# Altium PCB stm32f103_m95.PcbDoc (part 2 of 2)
Units mm, origin at the board's own origin, x right, y up, seen from the top; angles counter-clockwise.
Board outline 80 x 106 mm, 2 copper layers (Top Layer, Bottom Layer); 128 components, 90 nets, 432 pads, 87 vias.
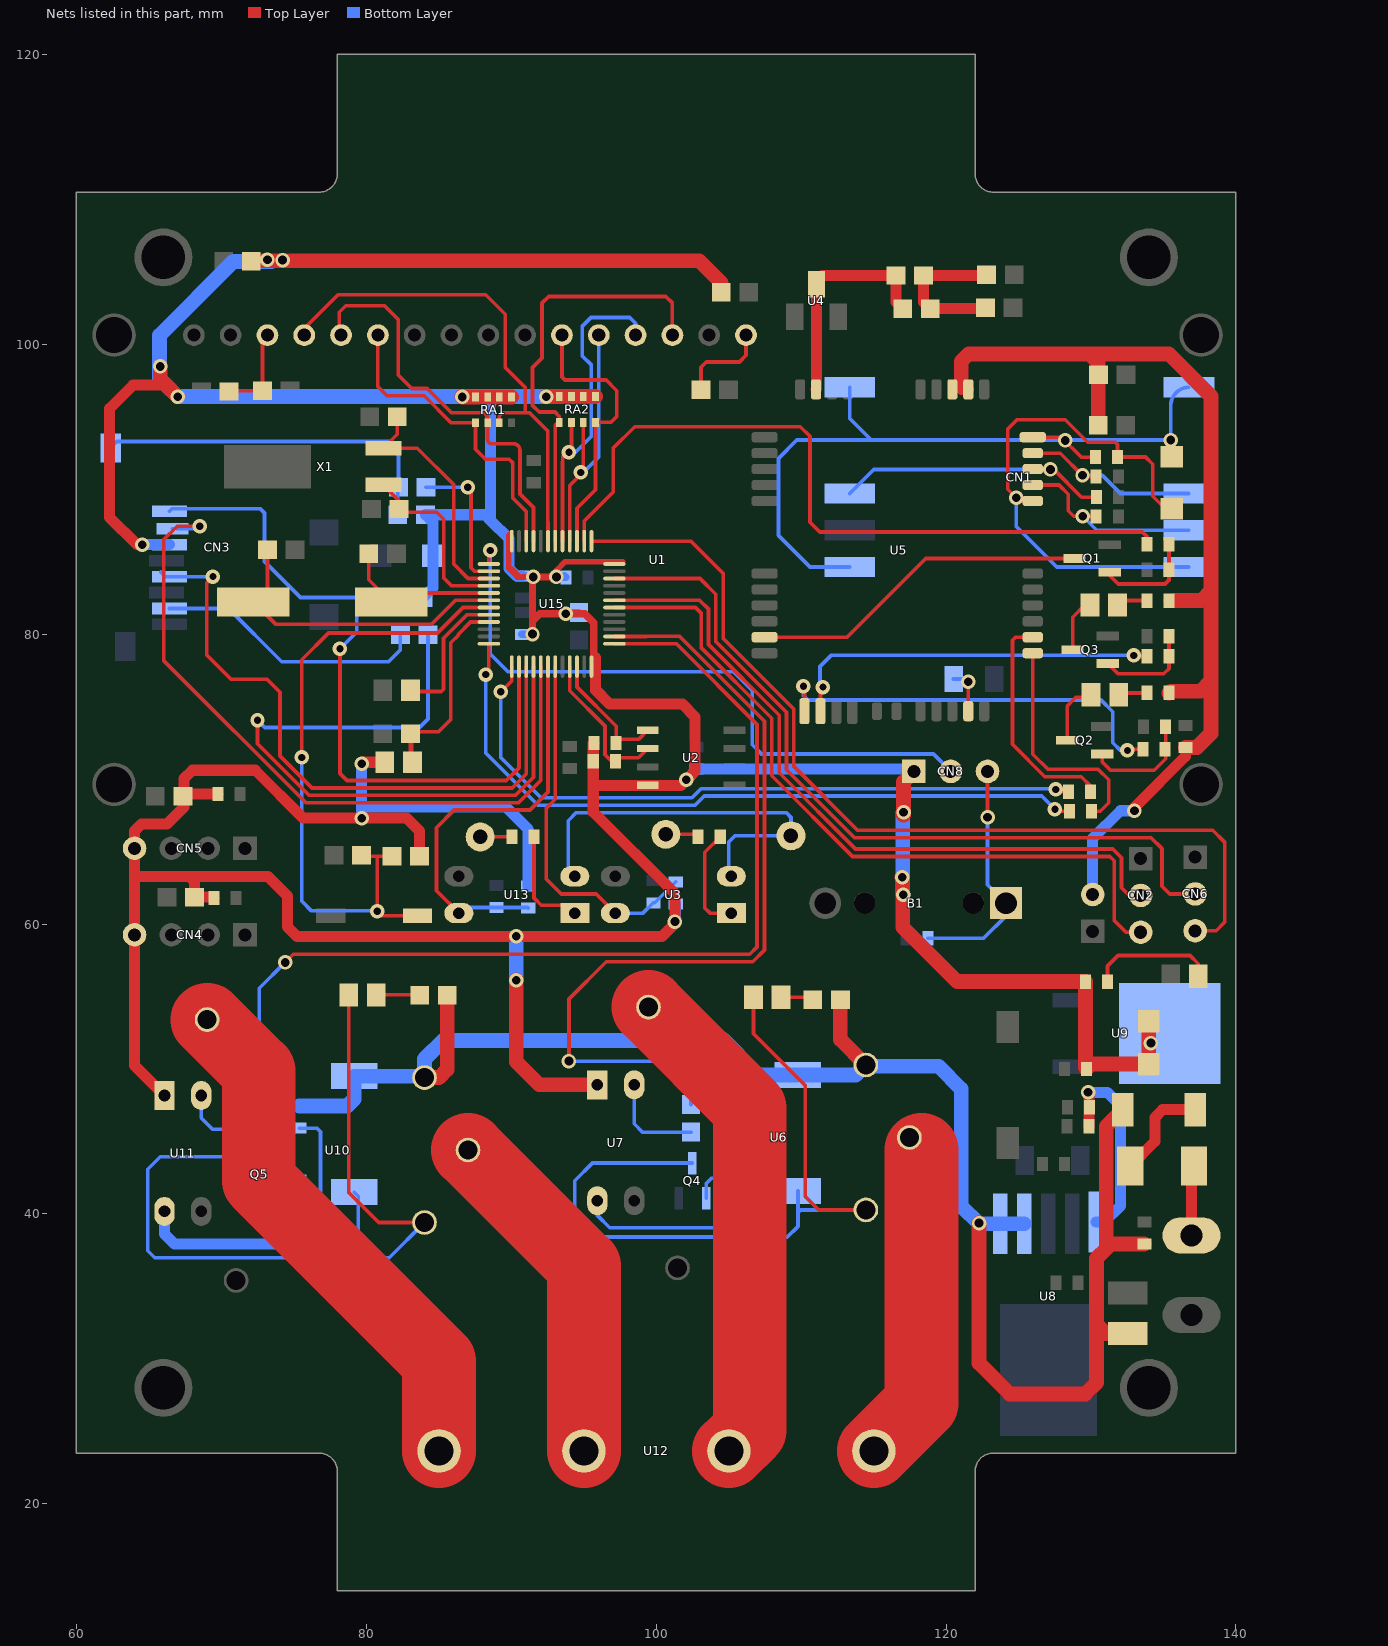
[diagram p2: the nets of this part, all layers, seen from the top]

## Via types
v1: diameter 1, hole 0.6, Top Layer to Bottom Layer, tented both sides, 63 vias
v2: diameter 1, hole 0.5, Top Layer to Bottom Layer, tented both sides, 24 vias

## Nets (pads, with @x,y where several pads share a name; then routed paths per layer and width w, separated by ;. In a path a pad name is that pad's centre, name@x,y a point inside that pad or via, vN(x,y) a via of type N, cw(c..) or ccw(c..) an arc to the next point about the centre after c; other vN are vias at no path point) (continued)
GND_SENSOR: CN12.1 U3.2 U13.2 | length 27.9
  Bottom Layer w0.254: U13.2@94.386,63.297 93.929,63.754 93.929,67.132 94.488,67.691 108.966,67.691 109.296,67.361 CN12.1@109.296,66.091 105.435,66.091 105.004,65.659 105.004,63.475 U3.2@105.181,63.297
GSM_PW: R5.1 U15.38 | length 51.8
  Top Layer w0.254: U15.38@95.036,86.423 95.036,87.351 ; 95.044,87.351 95.044,87.805 97.028,89.789 97.028,92.837 98.512,94.321 109.946,94.321 110.617,93.65 110.617,87.732 111.292,87.057 133.542,87.057 133.858,86.741 R5.1@133.858,86.209
IN0: C41.1 R4.1 U3.4 U15.19 | length 25.7
  Top Layer w0.254: U15.19@93.036,77.763 93.036,68.605 92.405,67.974 92.405,63.119 93.447,62.078 95.861,62.078 U3.4@97.181,60.757
  Bottom Layer w0.254: U3.4@97.181,60.757 99.087,60.757 C41.1@99.798,61.468 99.897,61.468 R4.1@101.345,62.916
IN1: C46.1 R29.1 U13.4 U15.18 | length 28.8
  Top Layer w0.254: U13.4@86.386,60.757 84.836,62.307 84.836,66.65 86.055,67.869 91.288,67.869 92.536,69.117 U15.18@92.536,77.763
  Bottom Layer w0.254: U13.4@86.386,60.757 86.767,61.138 C46.1@88.978,61.138 91.137,61.138 R29.1@91.162,61.112
INPUT0A: CN9.1 R21.1 | length 2.3
  Top Layer w0.254: CN9.1@100.66,66.192 102.719,66.192 R21.1@102.895,66.016
INPUT1A: CN11.1 R30.1 | length 2.2
  Top Layer w0.254: CN11.1@87.859,66.015 90.016,66.015 R30.1@90.043,66.041
"LCD DATA0": RA2.8 U1.11 U15.39 | length 19.2
  Top Layer w0.254: U1.11@93.497,100.635 93.497,97.739 93.701,97.536 96.545,97.536 97.282,96.799 97.282,95.021 96.876,94.615 RA2.8@95.809,94.615 95.809,92.743 95.809,89.961 94.544,88.697 ; U15.39@94.536,86.423 94.536,88.697
"LCD DATA1": RA2.7 U1.12 U15.40 | length 18.4
  Top Layer w0.254: U15.40@94.036,86.423 94.036,90.252 94.958,91.173 RA2.7@94.958,94.615
  Bottom Layer w0.254: v2@95.047,91.237 96.037,92.227 U1.12@96.037,100.635
  other v2: 94.793,91.161
"LCD DATA2": RA2.6 U1.13 U15.41 | length 24.4
  Top Layer w0.254: U15.41@93.536,86.423 93.536,91.907 93.544,91.915 ; 93.544,90.76 93.544,91.915 ; v2(93.98,92.558) ccw(c93.98,92.122) 93.544,92.122 93.544,91.915 ; v2@94.158,92.529 RA2.6@94.158,94.615
  Bottom Layer w0.254: v2(93.98,92.558) 94.437,92.558 95.529,93.65 95.529,98.577 94.906,99.2 94.906,101.27 94.92,101.27 95.504,101.854 98.171,101.854 98.577,101.448 U1.13@98.577,100.635
"LCD DATA3": RA2.5 U1.14 U15.42 | length 29.9
  Top Layer w0.254: U15.42@93.036,86.423 93.036,94.332 cw(c93.32,94.332) 93.099,94.509 93.214,94.509 RA2.5@93.32,94.615 93.32,95.021 93.015,95.326 91.923,95.326 91.465,95.783 91.465,98.4 92.126,99.06 92.126,102.845 92.583,103.302 100.66,103.302 101.117,102.845 U1.14@101.117,100.635
LCD_E: RA1.5 U1.6 U15.46 | length 21.9
  Top Layer w0.254: U1.6@80.797,100.635 80.797,97.079 81.432,96.444 83.991,96.444 85.845,94.59 RA1.5@87.528,94.59 87.528,92.761 88.214,92.075 89.865,92.075 90.094,91.846 90.094,89.408 91.036,88.466 U15.46@91.036,86.423
LCD_R/W: RA1.6 U1.5 U15.45 | length 28.4
  Top Layer w0.254: U1.5@78.257,100.635 78.13,100.762 78.13,102.21 78.588,102.667 81.255,102.667 82.206,101.715 82.206,97.88 83.134,96.952 84.201,96.952 85.878,95.275 88.113,95.275 88.367,95.021 RA1.6@88.367,94.59 88.367,93.447 ccw(c88.672,93.447) 88.672,93.142 90.145,93.142 cw(c90.145,92.685) 90.602,92.685 90.602,89.674 91.536,88.74 U15.45@91.536,86.423
LCD_RS: RA1.7 U1.4 U15.43 | length 35.8
  Top Layer w0.254: U1.4@75.717,100.635 75.717,101.092 78.054,103.429 88.24,103.429 89.586,102.083 89.586,98.4 90.957,97.028 90.957,95.275 ; RA1.7@89.167,94.437 RA1.7@89.167,94.59 89.167,95.034 89.408,95.275 90.957,95.275 ; 92.528,87.296 92.528,87.732 ; U15.43@92.536,86.423 92.536,87.724 92.528,87.732 ; 90.957,95.275 91.255,95.275 92.528,94.002 92.528,87.732
MCU_RX: R35.2 U15.13 | length 47.5
  Top Layer w0.254: v2(89.281,76.022) 90.036,76.777 U15.13@90.036,77.763 ; v2(127.559,69.291) 127.713,69.137 R35.2@128.448,69.137
  Bottom Layer w0.254: v2@89.269,76.276 89.269,71.487 92.05,68.707 102.464,68.707 103.099,69.342 127.508,69.342 v2(127.559,69.291)
MCU_TX: R34.2 U15.12 | length 50.1
  Top Layer w0.254: v2(88.24,77.216) 88.456,77.433 U15.12@88.456,79.343 ; v2(127.508,67.92) 127.636,67.791 R34.2@128.524,67.791
  Bottom Layer w0.254: v2(88.24,77.216) 88.24,71.799 91.839,68.199 102.674,68.199 103.309,68.834 126.594,68.834 v2(127.508,67.92)
NetB1_1: B1.1 C29.1 CN8.3 | length 16.6
  Top Layer w0.254: v1@122.809,67.31 v1(122.86,67.361) CN8.3@122.86,70.536
  Bottom Layer w0.254: C29.1@118.745,59.031 122.607,59.031 124.131,60.555 B1.1@124.131,61.443 122.86,62.714 v1(122.86,67.361)
NetC1_2: C1.2 C2.2 C4.1 C5.1 | length 10.7
  Top Layer w0.762: C2.2@122.724,102.513 122.673,102.462 C4.1@118.909,102.462 118.452,102.919 C5.1@118.452,104.748 122.749,104.748 C1.2@122.8,104.799
NetC4_2: C4.2 C5.2 U4.1 U5.39 | length 15.6
  Top Layer w0.762: U5.39@111.032,96.89 111.057,96.915 111.057,104.323 111.482,104.748 C5.2@116.552,104.748 116.552,102.919 C4.2@117.009,102.462
NetC14_1: C14.1 U5.19 | length 3.2
  Top Layer w0.254: U5.19@121.532,74.69 v1(121.532,76.726) v1@121.564,76.759
  Bottom Layer w0.254: C14.1@120.517,76.911 121.346,76.911 v1(121.532,76.726)
NetC25_1: C25.1 L3.2 U15.9 | length 15.1
  Top Layer w0.254: C25.1@83.037,73.134 83.037,71.302 L3.2@83.139,71.2 ; C25.1@83.139,73.134 L3.2@83.139,71.2 ; L3.2@83.175,71.164 L3.2@83.139,71.2 ; C25.1@83.672,73.232 83.632,73.272 84.981,73.272 85.827,74.117 85.827,79.408 86.335,79.916 86.335,79.985 87.193,80.843 U15.9@88.456,80.843
NetD1_1: D1.1 LED4.2 Q4.3 U6.3 | length 55.1
  Top Layer w0.254: LED4.2@106.718,54.946 106.718,52.438 110.287,48.87 110.287,41.199 111.211,40.275 U6.3@114.47,40.275 U6.3@114.327,40.132
  Bottom Layer w0.254: Q4.3@102.496,43.512 95.608,43.512 94.386,42.291 94.386,38.913 94.894,38.405 109.042,38.405 109.779,39.141 109.779,40.081 ; D1.1@109.779,41.58 109.779,40.081 ; U6.3@114.47,40.275 109.972,40.275 109.779,40.081
NetD2_1: D2.1 F1.2 | length 7
  Top Layer w0.762: F1.2@132.709,43.307 134.417,45.015 134.417,46.66 134.95,47.193 D2.1@137.185,47.193
NetD4_1: D4.1 LED6.2 Q5.3 U10.3 | length 58.3
  Top Layer w0.254: LED6.2@78.785,55.115 78.785,41.484 80.858,39.411 U10.3@84.015,39.411
  Bottom Layer w0.254: Q5.3@72.6,43.944 65.788,43.944 64.922,43.078 64.922,37.465 65.405,36.982 79.451,36.982 ; D4.1@79.172,41.504 79.451,41.224 79.451,36.982 ; U10.3@84.015,39.411 81.586,36.982 79.451,36.982
NetF1_1: F1.1 J1.1 | length 4.9
  Top Layer w0.762: J1.1@136.931,38.52 136.931,43.129 F1.1@137.109,43.307
NetL4_1: L4.1 U15.8 | length 10.1
  Top Layer w0.254: L4.1@83.037,76.131 83.121,76.048 85.166,76.048 85.319,76.2 85.319,79.723 86.938,81.343 87.224,81.343 ; 87.591,81.343 87.224,81.343 ; U15.8@88.456,81.343 87.224,81.343
NetLED2_1: LED2.1 R10.2 | length 2
  Top Layer w0.254: LED2.1@131.91,75.825 132.03,75.945 R10.2@133.858,75.945
NetLED2_2: LED2.2 Q2.3 | length 4.4
  Top Layer w0.254: Q2.3@128.354,72.678 128.354,75.04 128.956,75.641 LED2.2@130.099,75.641
NetLED3_1: LED3.1 R13.2 | length 2.1
  Top Layer w0.254: LED3.1@131.834,82.022 132.132,82.32 R13.2@133.858,82.32
NetLED3_2: LED3.2 Q3.3 | length 3.8
  Top Layer w0.254: Q3.3@128.735,78.926 128.735,81.167 129.591,82.022 LED3.2@129.934,82.022
NetLED4_1: LED4.1 R19.2 | length 2.3
  Top Layer w0.254: LED4.1@108.618,54.946 110.628,54.946 R19.2@110.805,54.769
NetLED5_1: LED5.1 R26.2 | length 8.7
  Top Layer w0.254: R26.2@131.14,56.034 131.14,57.099 131.87,57.829 136.837,57.829 137.396,57.269 LED5.1@137.396,56.394
NetLED6_1: LED6.1 R28.2 | length 3
  Top Layer w0.254: LED6.1@80.685,55.115 83.66,55.115 R28.2@83.684,55.091
NetQ1_1: Q1.1 R5.2 R6.2 | length 7.1
  Top Layer w0.254: Q1.1@131.287,84.276 131.287,84.054 131.877,83.464 135.103,83.464 135.382,83.744 R6.2@135.382,84.431 R5.2@135.382,86.209
NetQ2_1: Q2.1 R14.1 R16.2 | length 7.8
  Top Layer w0.254: Q2.1@130.779,71.728 130.779,71.176 131.343,70.612 133.045,70.612 134.366,70.612 135.153,71.399 R14.1@135.153,72.109 ; R14.1@135.103,72.058 R14.1@135.153,72.109 ; R16.2@135.153,73.611 R14.1@135.153,72.109
NetQ3_1: Q3.1 R15.2 R17.1 | length 6.9
  Top Layer w0.254: Q3.1@131.16,77.976 131.87,77.267 135.026,77.267 135.382,77.622 R15.2@135.382,78.462 R17.1@135.382,79.856
NetQ4_1: Q4.1 R38.1 | length 3.4
  Bottom Layer w0.254: Q4.1@103.446,41.087 103.446,42.105 103.81,42.469 R38.1@105.713,42.469
NetQ5_1: Q5.1 R41.1 | length 1.7
  Bottom Layer w0.254: Q5.1@73.55,41.461 Q5.1@73.55,41.519 74.563,41.519 R41.1@75.028,41.984
NetR1_2: R1.2 R3.1 U1.3 | length 6.5
  Top Layer w0.254: R3.1@70.522,96.747 70.522,96.798 R1.2@72.838,96.798 72.838,100.635 U1.3@73.177,100.635
NetR2_1: R2.1 U1.16 | length 6.4
  Top Layer w0.254: R2.1@103.094,96.869 103.094,98.42 103.454,98.781 105.74,98.781 106.197,99.238 U1.16@106.197,100.635
NetR14_2: R14.2 U5.12 | length 28.6
  Top Layer w0.254: v2(110.16,76.403) 110.232,76.331 U5.12@110.232,74.69 ; v2(132.512,71.984) 132.587,72.058 R14.2@133.579,72.058
  Bottom Layer w0.254: v2(110.16,76.403) 110.16,75.768 110.465,75.463 130.683,75.463 131.496,74.651 131.496,72.517 132.029,71.984 v2(132.512,71.984)
NetR15_1: R15.1 U5.13 | length 26.3
  Top Layer w0.254: U5.13@111.332,74.69 111.332,76.178 v2(111.506,76.352) ; v2(132.944,78.537) 133.018,78.462 R15.1@133.858,78.462 R15.1@133.663,78.657
  Bottom Layer w0.254: v2@111.303,76.429 111.303,77.775 112.065,78.537 v2(132.944,78.537)
NetR20_1: R20.1 R38.2 U7.4 | length 19.9
  Bottom Layer w0.254: U7.4@95.943,40.912 95.943,39.897 96.799,39.04 104.851,39.04 105.713,39.902 R38.2@105.713,40.945 106.985,40.945 107.417,41.377 107.417,44.704 106.578,45.542 R20.1@105.615,45.542
NetR21_2: R21.2 U3.1 | length 7.3
  Top Layer w0.254: R21.2@104.419,66.016 103.353,64.949 103.353,61.112 103.708,60.757 U3.1@105.181,60.757
NetR22_2: R22.2 U7.2 | length 6.8
  Bottom Layer w0.254: U7.2@98.483,48.912 98.483,46.221 99.059,45.645 R22.2@102.401,45.645
NetR24_2: R24.2 R27.1 U8.5 | length 14.1
  Top Layer w0.762: v1(129.794,48.387) 129.87,48.311 R27.1@129.87,46.049
  Bottom Layer w0.762: v1(129.794,48.387) 131.14,48.387 132.029,47.498 132.029,40.564 130.912,39.447 U8.5@130.342,39.447
NetR30_2: R30.2 U13.1 | length 7.5
  Top Layer w0.254: R30.2@91.567,66.041 91.567,61.798 92.075,61.29 93.853,61.29 U13.1@94.386,60.757
NetR31_2: R31.2 U11.2 | length 5.9
  Bottom Layer w0.254: U11.2@68.612,48.175 68.612,46.628 69.392,45.848 R31.2@72.607,45.848
NetR39_1: R39.1 R41.2 U11.4 | length 21.1
  Bottom Layer w0.254: R39.1@75.363,45.923 76.581,45.923 76.835,45.669 76.835,41.529 76.124,40.818 R41.2@75.386,40.818
  Bottom Layer w0.762: U11.4@66.072,40.175 66.072,38.601 66.751,37.922 74.651,37.922 75.386,38.657 R41.2@75.386,40.818
OUT1: R22.1 U15.26 | length 59.5
  Top Layer w0.254: v1(93.98,50.546) 93.98,54.839 96.545,57.404 106.662,57.404 107.467,58.21 107.467,73.987 101.603,79.851 98.425,79.851 ; U15.26@97.116,79.843 99.303,79.843
  Bottom Layer w0.254: v1(93.98,50.546) 101.473,50.546 102.401,49.618 R22.1@102.401,47.545
OUT2: R31.1 U15.25 | length 71.1
  Top Layer w0.254: v1(74.397,57.353) 74.955,57.912 106.451,57.912 106.959,58.42 106.959,73.776 101.401,79.335 98.611,79.335 ; U15.25@97.116,79.343 98.603,79.343 98.611,79.335 ; 98.374,79.335 98.611,79.335
  Bottom Layer w0.254: R31.1@72.607,47.748 72.607,55.564 v1(74.397,57.353)
PWRKEY: Q1.3 U5.10 | length 23.6
  Top Layer w0.254: U5.10@107.482,79.79 113.166,79.79 118.601,85.226 Q1.3@128.862,85.226
RL_CM0: U6.5 U12.1 | length 23.3
  Top Layer w2.286: U6.5@117.47,45.275 118.304,44.441
  Top Layer w5.08: U12.1@115.015,23.646 118.304,26.935 118.304,44.441
RL_CM1: U10.4 U12.4 | length 36.4
  Top Layer w5.08: U10.4@69.015,53.411 72.566,49.86 72.566,42.293 85.015,29.844 U12.4@85.015,23.646
RL_NO0: U6.4 U12.2 | length 34.1
  Top Layer w5.08: U6.4@99.47,54.275 106.451,47.293 106.451,25.083 U12.2@105.015,23.646
RL_NO1: U10.5 U12.3 | length 24.1
  Top Layer w5.08: U10.5@87.015,44.411 95.015,36.411 U12.3@95.015,23.646
RST: C24.1 R25.2 SW2.1 U15.7 | length 45.4
  Top Layer w0.254: v2(75.54,71.501) 75.54,78.232 77.394,80.086 84.912,80.086 86.669,81.843 U15.7@88.456,81.843 ; C24.1@79.659,64.752 79.735,64.675 80.645,64.675 ; R25.2@81.772,64.675 80.645,64.675 ; SW2.1@83.541,60.579 81.051,60.579 v2(80.747,60.884) 80.747,64.574 80.645,64.675
  Bottom Layer w0.254: v2(75.54,71.501) 75.54,61.595 76.225,60.909 80.721,60.909 v2(80.747,60.884)
RTXC1: C21.2 U15.4 X1.2 | length 12.9
  Top Layer w0.254: X1.2@81.178,90.297 82.261,89.215 C21.2@82.261,88.639 82.482,88.417 84.861,88.417 85.344,87.935 85.344,83.871 85.872,83.343 U15.4@88.456,83.343
RTXC2: C19.2 U15.3 X1.1 | length 16.8
  Top Layer w0.254: C19.2@82.134,94.989 82.134,93.792 X1.1@81.178,92.837 83.515,92.837 86.03,90.322 86.03,84.836 87.023,83.843 U15.3@88.456,83.843
RX: CN2.2 U15.31 | length 50.9
  Top Layer w0.254: U15.31@97.116,82.343 101.357,82.343 101.349,82.351 ; 100.228,82.351 101.349,82.351 ; CN2.2@133.426,61.976 132.639,61.976 132.105,62.509 132.105,64.574 131.503,65.176 113.752,65.176 108.483,70.445 108.483,74.408 103.607,79.284 103.607,81.737 102.993,82.351 101.349,82.351
RX_GSM: R34.1 U5.21 | length 15.9
  Top Layer w0.254: U5.21@125.982,78.69 125.982,71.724 127.025,70.68 130.488,70.68 131.216,69.952 131.216,68.377 130.631,67.791 R34.1@130.048,67.791
SCL: R33.1 U2.6 U15.21 | length 10.6
  Top Layer w0.254: U15.21@94.036,77.763 94.036,76.093 96.469,73.66 96.469,71.683 96.932,71.22 R33.1@97.18,71.22 97.432,71.472 98.771,71.472 U2.6@99.41,72.111
SD_CK: CN3.5 U15.15 | length 45.6
  Top Layer w0.254: v2(69.418,83.972) 68.986,83.541 68.986,78.562 70.663,76.886 73.152,76.886 74.041,75.997 74.041,71.603 76.251,69.393 90.068,69.393 91.036,70.361 U15.15@91.036,77.763
  Bottom Layer w0.254: CN3.5@65.811,84.293 66.13,83.974 CN3.5@66.421,83.974 69.416,83.974 v2(69.418,83.972)
SD_DT: R11.1 U15.2 | length 10
  Top Layer w0.254: v2@87.3,89.992 87.224,89.916 87.224,84.582 87.463,84.343 U15.2@88.456,84.343
  Bottom Layer w0.254: R11.1@84.123,90.146 86.993,90.146 v2@87.224,89.916
  other v2: 86.995,90.145
SD_MISO: CN3.7 R8.2 | length 18.8
  Bottom Layer w0.254: CN3.7@66.421,81.774 70.499,81.774 74.168,78.105 81.534,78.105 82.35,78.921 R8.2@82.35,79.961
SD_MOSI: CN3.2 U15.17 | length 51.7
  Top Layer w0.254: v2(68.504,87.452) 66.954,87.452 66.015,86.512 66.015,78.192 75.83,68.377 90.5,68.377 92.036,69.913 U15.17@92.036,77.763
  Bottom Layer w0.254: CN3.2@66.621,87.274 68.326,87.274 v2(68.504,87.452)
SD_WP: CN3.10 R9.2 R11.2 | length 24.8
  Bottom Layer w0.254: CN3.10@62.357,92.862 62.789,93.294 81.737,93.294 82.223,92.809 R11.2@82.223,90.146 82.172,90.095 R9.2@82.172,88.241
SDA: R32.2 U2.5 U15.22 | length 8.9
  Top Layer w0.254: U15.22@94.536,77.763 94.536,76.355 97.238,73.653 R32.2@97.238,72.5 ; R32.2@97.231,72.493 R32.2@97.238,72.5 ; U2.5@99.41,73.381 98.771,72.742 97.48,72.742 R32.2@97.238,72.5
SIM_CLK: C8.1 CN1.3 U5.30 | length 15.2
  Top Layer w0.254: U5.30@125.982,92.49 127.88,92.49 v1(129.413,90.957) 129.496,90.874 C8.1@130.36,90.874 ; 127.88,92.489 v1@129.496,90.874
  Bottom Layer w0.254: v1(129.413,90.957) 130.785,90.957 132.029,89.713 CN1.3@136.754,89.713
SIM_DATA: C7.1 CN1.7 U5.29 | length 20
  Top Layer w0.254: U5.29@125.982,91.39 127.406,91.39 v1@127.433,91.364 ; v1(127.203,91.364) v1@127.433,91.364 ; C7.1@130.385,89.452 129.351,89.452 127.439,91.364 v1@127.433,91.364
  Bottom Layer w0.254: CN1.7@113.354,89.713 115.005,91.364 v1(127.203,91.364)
SIM_GND: C3.2 C6.1 CN1.4 CN1.5 CN1.8 U5.31 | length 53.4
  Top Layer w0.254: U5.31@125.982,93.59 127.949,93.59 129.337,92.202 130.291,92.202 C6.1@130.309,92.22 ; v1(135.509,93.396) cw(c135.509,93.345) 135.56,93.345 C3.2@135.56,92.249
  Bottom Layer w0.254: CN1.5@113.354,84.633 110.617,84.633 108.433,86.817 108.433,92.126 109.703,93.396 114.833,93.396 ; CN1.8@113.354,97.033 113.354,94.876 114.833,93.396 ; CN1.4@136.754,97.033 ccw(c136.754,95.788) 135.509,95.788 v1(135.509,93.396) 114.833,93.396
  other v1: 128.219,93.37
SIM_RST: C9.1 CN1.2 U5.28 | length 14.6
  Top Layer w0.254: U5.28@125.982,90.29 127.794,90.29 128.422,89.662 128.422,88.519 128.811,88.131 C9.1@130.36,88.131 130.352,88.138 v1(129.438,88.138)
  Bottom Layer w0.254: v1(129.438,88.138) 130.404,87.173 CN1.2@136.754,87.173
SIM_VCC: C3.1 C6.2 CN1.1 U5.27 | length 37.2
  Top Layer w0.254: U5.27@125.982,89.19 125.059,89.19 v1(124.841,89.408) 124.257,89.992 124.257,94.158 124.892,94.793 128.219,94.793 129.769,93.243 131.674,93.243 131.833,93.084 C6.2@131.833,92.22 133.764,92.22 134.264,91.719 134.264,89.51 135.125,88.649 C3.1@135.56,88.649
  Bottom Layer w0.254: v1(124.841,89.408) 124.841,87.427 127.635,84.633 CN1.1@136.754,84.633
SPI1_MISO: R8.1 U15.16 | length 48.3
  Top Layer w0.254: v2(72.492,74.066) 72.492,72.434 76.04,68.885 90.29,68.885 91.528,70.123 91.528,71.081 91.536,71.089 U15.16@91.536,77.763
  Bottom Layer w0.254: v2(72.492,74.066) 73,73.558 83.668,73.558 84.25,74.141 R8.1@84.25,79.961
SPI1_NSS: CN3.1 R12.2 U15.14 | length 52.9
  Top Layer w0.254: v2(78.181,78.994) 78.181,70.383 78.664,69.901 89.662,69.901 90.536,70.775 U15.14@90.536,77.763
  Bottom Layer w0.254: CN3.1@66.421,88.484 66.583,88.646 72.695,88.646 72.974,88.367 72.974,85.014 75.462,82.526 79.35,82.526 ; v2(78.181,78.994) 79.35,80.162 79.35,82.526 ; 79.502,82.374 79.35,82.526 ; R12.2@82.02,82.526 79.35,82.526
SWCLK: CN6.3 U15.37 | length 65
  Top Layer w0.254: U15.37@95.536,86.423 102.387,86.423 104.623,84.187 104.623,79.705 109.499,74.828 109.499,70.866 113.894,66.472 138.405,66.472 139.217,65.659 139.217,60.122 138.633,59.538 CN6.3@137.185,59.538
SWDIO: CN6.2 U15.34 | length 54.8
  Top Layer w0.254: U15.34@97.116,83.843 103.025,83.843 104.115,82.753 104.115,79.495 108.991,74.618 108.991,70.656 113.683,65.964 134.143,65.964 134.899,65.207 134.899,62.611 135.433,62.078 CN6.2@137.185,62.078
TX: CN2.3 U15.30 | length 51.7
  Top Layer w0.254: U15.30@97.116,81.843 102.714,81.843 103.099,81.458 103.099,79.074 107.975,74.197 107.975,70.235 113.542,64.668 131.293,64.668 131.597,64.364 131.597,60.249 132.41,59.436 CN2.3@133.426,59.436
TX_GSM: R35.1 U5.22 | length 15.6
  Top Layer w0.254: U5.22@125.982,79.79 124.79,79.79 124.587,79.587 124.587,72.4 126.815,70.172 129.319,70.172 129.972,69.52 R35.1@129.972,69.137
V_BAT: CN8.2 U15.1 | length 45.4
  Top Layer w0.254: U15.1@88.456,84.843 88.456,85.688 v2(88.544,85.776)
  Bottom Layer w0.254: v2(88.544,85.776) 88.544,78.638 89.764,77.419 105.308,77.419 106.629,76.098 106.629,72.365 107.264,71.73 119.126,71.73 CN8.2@120.32,70.536
VCC: C15.1 C20.1 C22.1 C23.1 C26.1 C27.1 C30.1 C31.1 C35.1 C36.1 C37.1 C43.1 C44.1 CN3.3 CN4.4 CN5.4 CN8.1 L3.1 R4.2 R9.1 R12.1 R18.1 R23.1 R25.1 R26.1 R29.2 R32.1 R33.2 RA1.1 RA1.2 RA1.3 RA1.4 RA2.1 RA2.2 RA2.3 RA2.4 U2.8 U7.1 U9.2 U11.1 U15.24 U15.36 U15.48 | length 375.1
  Top Layer w0.381: 89.865,86.868 89.814,86.817 89.814,84.557 90.424,83.947 90.576,83.947 ; 90.036,84.487 90.576,83.947 ; v1(91.516,83.947) 90.576,83.947 ; v1(93.116,83.947) 93.116,84.404 93.726,85.014 97.688,85.014
  Top Layer w0.508: v1(91.465,80.01) 91.465,80.899 ; v1(93.116,83.947) v1(91.516,83.947) 91.465,83.896 91.465,80.899 ; 96.793,75.176 96.613,75.176 95.682,76.107 95.682,80.797 95.072,81.407 v1(93.751,81.407) 91.973,81.407 91.465,80.899
  Top Layer w0.762: v1(64.549,86.174) 64.168,86.174 62.281,88.062 62.281,95.555 63.919,97.193 66.18,97.193 ; U11.1@66.072,48.175 64.008,50.239 CN4.4@64.008,59.258 64.008,63.144 ; R23.1@67.34,68.816 R23.1@67.416,68.892 ; R23.1@67.416,68.816 67.416,68.077 66.243,66.904 64.491,66.904 64.008,66.421 CN5.4@64.008,65.227 64.008,63.144 ; 67.97,63.119 68.153,62.936 R18.1@68.153,61.856 69.438,61.856 C23.1@69.494,61.8 ; C31.1@69.774,68.988 67.512,68.988 R23.1@67.416,68.892 ; v1(79.68,71.069) 79.774,71.164 L3.1@81.275,71.164 ; R25.1@83.672,64.675 83.672,66.416 82.779,67.31 v1(79.68,67.31) 75.64,67.31 72.338,70.612 67.996,70.612 67.416,70.033 R23.1@67.416,68.892 ; R32.1@95.707,72.493 95.656,72.442 R33.2@95.656,71.22 95.656,69.571 ; 95.783,69.698 95.656,69.571 ; 95.798,78.384 95.798,76.171 96.793,75.176 101.811,75.176 102.692,74.295 102.692,70.561 v1(102.083,69.952) 101.702,69.571 U2.8@99.41,69.571 95.656,69.571 ; 64.008,63.144 64.135,63.271 73.228,63.271 74.555,61.944 74.555,59.811 75.222,59.144 100.406,59.144 101.295,60.033 v1(101.295,60.173) 101.295,62.103 95.656,67.742 95.656,69.571
  Top Layer w1.016: v1(65.786,98.476) 65.786,97.587 66.18,97.193 v1(66.98,96.393) ; C35.1@72.065,105.722 72.108,105.766 102.972,105.766 104.491,104.246 C37.1@104.491,103.6 ; v1@86.589,96.393 v1(86.614,96.368) RA1.4@87.528,96.368 RA1.3@88.367,96.368 RA1.2@89.167,96.368 RA1.1@90.018,96.368 ; v1(90.348,56.134) 90.348,50.495 91.931,48.912 U7.1@95.943,48.912 ; v1(92.405,96.393) RA2.4@93.32,96.393 RA2.3@94.158,96.393 RA2.2@94.958,96.393 RA2.1@95.809,96.393 ; v1(116.967,63.221) 117.018,63.17 117.018,59.792 120.776,56.034 R26.1@129.616,56.034 129.616,50.087 C30.1@129.692,50.011 130.024,50.343 C44.1@133.988,50.343 C43.1@133.988,53.289 ; v1@117.069,67.513 v1(117.069,67.716) 117.069,69.825 CN8.1@117.78,70.536
  Bottom Layer w0.508: C36.1@90.73,79.985 91.44,79.985 v1(91.465,80.01) ; C15.1@90.753,84.023 91.44,84.023 v1(91.516,83.947) ; v1(93.116,83.947) 93.143,83.92 C27.1@93.777,83.92 C27.1@93.674,84.023 ; v1(93.751,81.407) 93.832,81.488 C22.1@94.673,81.488
  Bottom Layer w0.762: v1(64.549,86.174) CN3.3@66.421,86.174 ; v1(79.68,67.31) 79.68,68.072 ; v1(79.68,71.069) 79.68,68.072 ; R12.1@83.92,82.526 84.597,83.204 C20.1@84.597,85.403 84.597,87.716 R9.1@84.072,88.241 88.187,88.241 88.582,87.846 ; 88.57,96.393 88.582,96.38 88.582,87.846 ; C15.1@90.753,84.023 90.348,84.023 89.84,84.531 89.84,86.589 88.582,87.846 ; R29.2@91.162,62.636 91.162,66.547 89.637,68.072 79.68,68.072 ; v1(101.295,60.173) 101.345,60.222 R4.2@101.345,61.392 ; v1(102.083,69.952) C26.1@102.819,70.688 ; C26.1@102.795,70.688 C26.1@102.819,70.688 ; CN8.1@117.78,70.536 117.627,70.688 C26.1@102.819,70.688
  Bottom Layer w1.016: v1@73.457,105.715 70.815,105.715 65.735,100.635 65.735,97.638 v1(66.98,96.393) 88.57,96.393 v1(92.405,96.393) ; v1(90.348,56.134) v1@90.348,58.953 ; v1(117.043,62.027) 117.018,62.052 117.018,67.666 v1(117.069,67.716)
  other v1: 134.137,51.791 90.348,59.157 74.219,105.816 73.177,105.842
VGSM: C10.1 C11.1 C12.1 CN7.2 R10.1 R13.1 U5.33 U5.34 | length 71.5
  Top Layer w0.762: 121.056,97.46 121.056,96.89 U5.33@121.532,96.89 ; C11.1@130.5,94.405 C11.1@130.5,94.92 ; C10.1@130.5,97.91 C10.1@130.526,97.91 ; v1(132.994,67.818) 132.994,68.051 136.524,71.58 C12.1@136.524,72.187 ; R13.1@135.382,82.32 135.839,82.32
  Top Layer w1.016: 121.056,97.46 121.056,98.831 121.564,99.339 129.896,99.339 ; C11.1@130.5,94.92 130.5,97.91 130.5,98.735 129.896,99.339 ; R10.1@135.382,75.945 135.51,76.073 137.566,76.073 138.278,76.784 ; 135.839,82.32 137.592,82.32 138.278,83.006 ; C12.1@136.524,72.187 137.312,72.187 138.278,73.152 138.278,76.784 ; 129.896,99.339 135.357,99.339 138.278,96.418 138.278,83.006 ; 138.278,76.784 138.278,83.006
  Bottom Layer w0.762: CN7.2@130.117,62.041 130.117,65.906 132.029,67.818 v1(132.994,67.818)
VPP: C28.1 C45.1 D1.2 D2.2 D4.2 R19.1 R20.2 R28.1 R39.2 U6.2 U8.1 U8.2 U10.2 | length 123.7
  Top Layer w1.016: U10.2@84.015,49.411 85.022,49.411 85.584,49.973 R28.1@85.584,55.091 ; R19.1@112.705,54.769 112.705,52.04 U6.2@114.47,50.275 ; v1(122.276,39.37) 122.276,29.693 124.384,27.584 129.616,27.584 130.378,28.346 130.378,32.385 ; D2.2@132.185,47.193 131.047,46.055 131.047,37.601 ; C45.1@132.537,31.75 131.013,31.75 130.378,32.385 ; C28.1@133.679,37.922 131.369,37.922 131.047,37.601 ; 130.378,32.385 130.378,36.932 131.047,37.601
  Bottom Layer w1.016: R39.2@75.363,47.447 78.689,47.447 79.172,47.93 D4.2@79.172,49.504 83.923,49.504 U10.2@84.015,49.411 84.015,50.69 85.293,51.968 104.699,51.968 105.615,51.053 105.615,49.125 ; R20.2@105.615,47.066 105.615,49.125 ; U6.2@114.47,50.275 U6.2@114.385,50.19 ; U8.2@125.392,39.32 U8.1@123.742,39.32 122.275,39.32 121.056,40.538 121.056,48.616 119.482,50.19 U6.2@114.385,50.19 ; 105.615,49.125 106.069,49.58 D1.2@109.779,49.58 113.775,49.58 U6.2@114.385,50.19
XTAL1: C13.2 U15.5 XT2.2 | length 10.2
  Top Layer w0.254: C13.2@80.172,85.554 80.172,84.699 80.172,83.76 XT2.2@81.712,82.22 ; XT2.2@82.55,82.321 82.55,82.22 83.173,82.843 U15.5@88.456,82.843
XTAL2: C38.2 U15.6 XT2.1 | length 21.2
  Top Layer w0.254: XT2.1@72.212,82.22 73.736,80.696 84.506,80.696 86.145,82.335 88.448,82.335 U15.6@88.456,82.343 ; XT2.1@73.05,82.22 73.187,82.357 C38.2@73.187,85.834
pads on no net: B1.0 CN1.6 CN3.4 CN3.8 CN3.9 CN3.12 CN4.2 CN5.2 RA1.8 U1.M1 U1.M2 U1.M3 U1.M4 U5.1 U5.2 U5.3 U5.4 U5.5 U5.6 U5.7 U5.8 U5.9 U5.11 U5.14 U5.15 U5.16 U5.17 U5.18 U5.20 U5.24 U5.25 U5.26 U5.32 U5.41 U5.42 U5.223 U6.1 U10.1 U15.27 U15.28 U15.29 U15.32 U15.33

## Polygon pours and split planes (outlines as drawn)
GND on Top Layer "Bottom Layer-No Net" (solid, remove dead copper, pour order 2): 59.995,105.842 139.903,105.842 140.056,105.842 140.056,59.08 140.056,23.5 140,23.5 121.539,23.5 121.539,23.597 121.539,58.115 120.726,58.115 59.919,58.115 59.919,66.116 59.919,105.766 59.995,105.766
GND on Bottom Layer "Bottom Layer-No Net" (solid, remove dead copper, pour order 4): 59.944,105.816 140.056,105.816 140.056,104.546 140.056,23.52 138.633,23.52 121.336,23.52 121.336,23.673 121.336,58.014 118.008,58.014 60.046,58.014 60.046,60.706 60.046,105.816 59.944,105.816

## Keep-outs
Keep-Out Layer:
  the board outline again, w0.254

## Other copper
Top Layer:
  rectangle: 91.025,114.114 109.025,115.614
  rectangle: 91.025,109.185 97.025,114.185
  rectangle: 96.999,109.186 117.101,110.686
  rectangle: 116.993,109.194 119.993,119.194
  rectangle: 100.993,111.694 114.993,113.194
  rectangle: 112.993,113.194 114.993,119.194
  rectangle: 84.085,109.194 89.085,119.194
  rectangle: 89.085,116.694 113.085,119.194
  rectangle: 114.96,116.702 117.018,119.202
  region net NetC4_2: 109.803,109.2 110.025,108.448 110.279,107.686 110.295,105.369 110.287,103.657 111.862,103.683 111.819,107.808 112.343,109.2

## Silkscreen, mask and mechanical layers (free items; w line width, h text height)
Top Overlay:
  lines w0.254: 117.914,13.809 118.117,13.809 ; 118.422,27.982 118.498,27.906
Top Solder:
  lines w3.81: 71.12,51.079 73.152,49.047 73.152,41.783 85.014,29.921 85.014,26.772 ; 89.383,42.012 89.713,42.012 95.225,36.5 95.225,26.213 ; 102.159,51.537 106.299,47.396 106.299,25.324 ; 116.942,26.213 cw(c118.045,26.213) 117.265,26.993 ; 117.399,26.543 117.72,26.864 ccw(c115.552,29.032) 118.618,29.032 118.618,42.012

## Text inside footprints (layer, text, board x,y; h text height)
B1: Top Overlay "+" at 121.881,60.043 h0.51 r270
C3: Top Overlay "+" at 134.391,88.113 h1 r90
C20: Bottom Overlay "+" at 85.134,86.572 h1
C42: Top Overlay "+" at 122.606,44.374 h1 r90
C43: Top Overlay "+" at 133.452,54.458 h1
C44: Top Overlay "+" at 133.452,51.511 h1